# Altium PCB RF-UNIT-QRP.PcbDoc (part 2 of 3)
Units mm, origin at the board's own origin, x right, y up, seen from the top; angles counter-clockwise.
Board outline 187 x 77 mm, 2 copper layers (Top Layer, Top, Bottom Layer, Bottom); 258 components, 175 nets, 770 pads, 3772 vias.
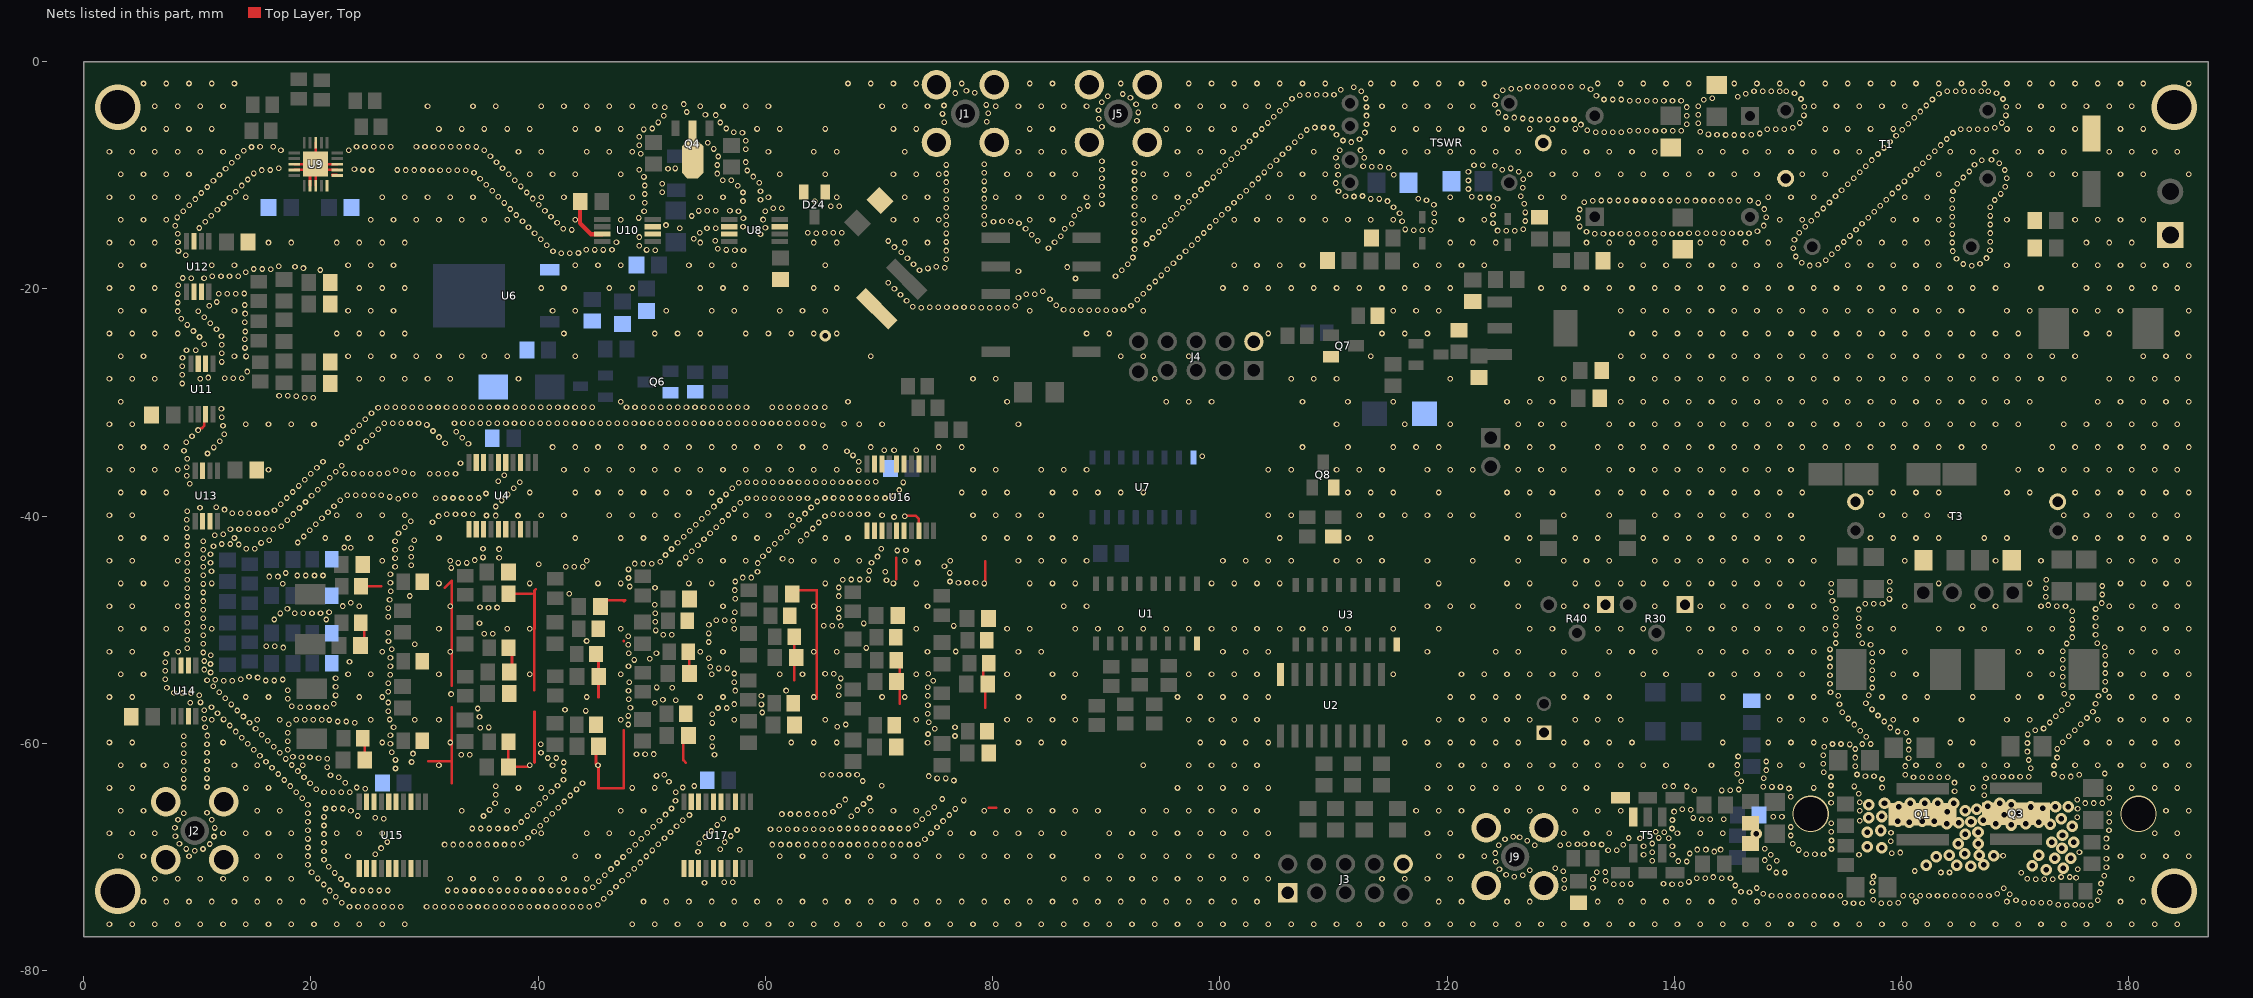
[diagram p2: the nets of this part, all layers, seen from the top]

## Via types
v1: diameter 0.5, hole 0.3, Top Layer, Top to Bottom Layer, Bottom, tented both sides, 3631 vias
v2: diameter 1.016, hole 0.486, Top Layer, Top to Bottom Layer, Bottom, tented both sides, 127 vias
v3: diameter 0.8, hole 0.486, Top Layer, Top to Bottom Layer, Bottom, tented both sides, 6 vias
v4: diameter 4, hole 3, Top Layer, Top to Bottom Layer, Bottom, 4 vias
v5: diameter 1, hole 0.5, Top Layer, Top to Bottom Layer, Bottom, 2 vias
v6: diameter 3.2, hole 3, Top Layer, Top to Bottom Layer, Bottom, 2 vias

## Nets (pads, with @x,y where several pads share a name; then routed paths per layer and width w, separated by ;. In a path a pad name is that pad's centre, name@x,y a point inside that pad or via, vN(x,y) a via of type N, cw(c..) or ccw(c..) an arc to the next point about the centre after c; other vN are vias at no path point) (continued)
GND: (continued)
  other v1: 2.271,-75.923 4.271,-75.923 6.271,-75.923 8.271,-75.923 10.271,-75.923 12.271,-75.923 14.271,-75.923 16.271,-75.923 18.271,-75.923 20.271,-75.923 22.271,-75.923 24.271,-75.923 26.271,-75.923 28.271,-75.923 48.271,-75.923 50.271,-75.923 52.271,-75.923 54.271,-75.923 56.271,-75.923 58.271,-75.923 60.271,-75.923 62.271,-75.923 64.271,-75.923 66.271,-75.923 68.271,-75.923 70.271,-75.923 72.271,-75.923 74.271,-75.923 76.271,-75.923 78.271,-75.923 80.271,-75.923 82.271,-75.923 84.271,-75.923 86.271,-75.923 88.271,-75.923 90.271,-75.923 92.271,-75.923 94.271,-75.923 96.271,-75.923 98.271,-75.923 100.271,-75.923 102.271,-75.923 104.271,-75.923 106.271,-75.923 108.271,-75.923 110.271,-75.923 112.271,-75.923 114.271,-75.923 116.271,-75.923 118.271,-75.923 120.271,-75.923 122.271,-75.923 124.271,-75.923 126.271,-75.923 128.271,-75.923 130.271,-75.923 132.271,-75.923 134.271,-75.923 136.271,-75.923 138.271,-75.923 140.271,-75.923 142.271,-75.923 144.271,-75.923 146.271,-75.923 148.271,-75.923 150.271,-75.923 152.271,-75.923 154.271,-75.923 156.271,-75.923 158.271,-75.923 160.271,-75.923 162.271,-75.923 164.271,-75.923 166.271,-75.923 168.271,-75.923 170.271,-75.923 172.271,-75.923 174.271,-75.923 176.271,-75.923 178.271,-75.923 180.271,-75.923 182.271,-75.923 184.271,-75.923 23.397,-74.368 24.151,-74.368 24.905,-74.368 25.659,-74.368 26.413,-74.368 27.167,-74.368 27.921,-74.368 30.183,-74.368 30.937,-74.368 31.691,-74.368 32.445,-74.368 33.199,-74.368 33.953,-74.368 34.707,-74.368 35.461,-74.368 36.215,-74.368 36.969,-74.368 37.723,-74.368 38.477,-74.368 39.231,-74.368 39.985,-74.368 40.739,-74.368 41.493,-74.368 42.247,-74.368 43.001,-74.368 43.755,-74.368 44.509,-74.368 174.535,-74.235 175.892,-74.235 176.646,-74.235 45.247,-74.215 173.781,-74.215 175.288,-74.19 155.769,-74.058 156.523,-74.058 158.202,-74.058 158.956,-74.058 22.728,-74.021 155.015,-74.03 159.709,-74.027 170.791,-74.02 171.545,-74.02 172.299,-74.02 173.053,-74.02 5.271,-73.923 7.271,-73.923 9.271,-73.923 11.271,-73.923 13.271,-73.923 15.271,-73.923 17.271,-73.923 19.271,-73.923 21.271,-73.923 49.271,-73.923 51.271,-73.923 53.271,-73.923 55.271,-73.923 57.271,-73.923 59.271,-73.923 61.271,-73.923 63.271,-73.923 65.271,-73.923 67.271,-73.923 69.271,-73.923 71.271,-73.923 73.271,-73.923 75.271,-73.923 77.271,-73.923 79.271,-73.923 81.271,-73.923 83.271,-73.923 85.271,-73.923 87.271,-73.923 89.271,-73.923 91.271,-73.923 93.271,-73.923 95.271,-73.923 97.271,-73.923 99.271,-73.923 101.271,-73.923 103.271,-73.923 119.271,-73.923 121.271,-73.923 125.271,-73.923 127.271,-73.923 133.271,-73.923 135.271,-73.923 137.271,-73.923 139.271,-73.923 141.271,-73.923 143.271,-73.923 145.271,-73.923 147.271,-73.923 161.271,-73.923 169.271,-73.923 179.271,-73.923 181.271,-73.923 177.276,-73.821 170.069,-73.803 157.502,-73.776 45.788,-73.688 22.195,-73.488 148.557,-73.409 149.311,-73.409 150.065,-73.409 150.819,-73.409 151.573,-73.409 152.327,-73.409 153.081,-73.409 153.835,-73.409 154.589,-73.409 160.147,-73.413 160.901,-73.412 161.655,-73.412 162.409,-73.412 163.163,-73.411 163.917,-73.411 164.671,-73.41 165.425,-73.41 166.179,-73.41 166.933,-73.409 167.687,-73.409 169.525,-73.281 147.822,-73.239 168.422,-73.242 46.321,-73.155 146.616,-73.113 177.446,-73.086 145.864,-73.06 157.439,-73.025 21.661,-72.955 23.756,-72.952 24.51,-72.952 25.264,-72.952 26.018,-72.952 26.772,-72.952 32.05,-72.952 32.804,-72.952 33.558,-72.952 34.312,-72.952 35.066,-72.952 35.82,-72.952 36.574,-72.952 37.328,-72.952 38.082,-72.952 38.836,-72.952 39.59,-72.952 40.344,-72.952 41.098,-72.952 41.852,-72.952 42.606,-72.952 43.36,-72.952 44.114,-72.952 130.308,-72.76 168.992,-72.748 147.266,-72.73 132.836,-72.711 44.81,-72.663 46.854,-72.622 145.352,-72.507 23.178,-72.468 21.128,-72.422 134.666,-72.386 135.42,-72.386 136.174,-72.37 139.801,-72.386 140.555,-72.386 139.048,-72.347 177.554,-72.34 157.439,-72.271 54.644,-72.261 56.376,-72.236 57.13,-72.226 141.284,-72.194 45.344,-72.13 47.387,-72.089 133.977,-72.081 130.308,-72.006 171.806,-71.973 172.56,-71.973 173.314,-71.973 22.644,-71.935 132.836,-71.957 6.271,-71.923 8.271,-71.923 10.271,-71.923 12.271,-71.923 14.271,-71.923 16.271,-71.923 18.271,-71.923 32.271,-71.923 34.271,-71.923 36.271,-71.923 38.271,-71.923 40.271,-71.923 42.271,-71.923 44.271,-71.923 86.271,-71.923 88.271,-71.923 90.271,-71.923 92.271,-71.923 94.271,-71.923 96.271,-71.923 98.271,-71.923 100.271,-71.923 102.271,-71.923 104.271,-71.923 114.271,-71.923 116.271,-71.923 118.271,-71.923 120.271,-71.923 171.054,-71.915 180.271,-71.923 20.595,-71.889 141.969,-71.88 142.723,-71.876 144.185,-71.876 144.939,-71.876 175.355,-71.816 143.439,-71.769 174.037,-71.758 174.791,-71.758 125.921,-71.747 157.53,-71.724 177.835,-71.641 126.662,-71.605 45.877,-71.596 47.92,-71.556 125.191,-71.558 22.111,-71.402 170.521,-71.382 20.062,-71.355 148.962,-71.361 149.716,-71.361 163.463,-71.364 164.217,-71.363 133.175,-71.343 133.929,-71.329 130.234,-71.256 161.158,-71.235 127.284,-71.18 124.608,-71.081 175.501,-71.077 46.41,-71.063 48.453,-71.023 129.525,-71.001 148.351,-70.919 178.029,-70.912 21.578,-70.869 19.739,-70.674 46.943,-70.53 48.986,-70.489 124.269,-70.407 141.092,-70.399 140.339,-70.358 149.025,-70.336 138.044,-70.323 147.963,-70.272 21.155,-70.245 178.029,-70.158 47.476,-69.997 49.52,-69.956 3.271,-69.923 5.271,-69.923 9.271,-69.923 15.271,-69.923 17.271,-69.923 19.739,-69.92 23.271,-69.923 43.271,-69.923 45.271,-69.923 61.271,-69.923 63.271,-69.923 65.271,-69.923 67.271,-69.923 69.271,-69.923 71.271,-69.923 73.271,-69.923 75.271,-69.923 77.271,-69.923 79.271,-69.923 81.271,-69.923 83.271,-69.923 85.271,-69.923 89.271,-69.923 91.271,-69.923 93.271,-69.923 95.271,-69.923 97.271,-69.923 99.271,-69.923 101.271,-69.923 103.271,-69.923 119.271,-69.923 121.271,-69.923 123.271,-69.923 179.271,-69.923 181.271,-69.923 183.271,-69.923 185.271,-69.923 168.932,-69.885 148.494,-69.801 156.254,-69.816 137.292,-69.8 139.832,-69.8 25.657,-69.757 151.621,-69.748 152.375,-69.748 153.129,-69.748 141.356,-69.693 159.138,-69.676 124.248,-69.653 159.889,-69.609 175.653,-69.584 138.044,-69.569 54.07,-69.536 143.515,-69.521 21.155,-69.491 9.766,-69.458 48.009,-69.464 50.053,-69.423 134.167,-69.396 134.921,-69.396 150.963,-69.379 57.753,-69.36 142.027,-69.348 142.781,-69.348 144.068,-69.348 56.03,-69.328 10.504,-69.3 153.828,-69.3 9.031,-69.29 147.967,-69.262 26.179,-69.213 19.739,-69.166 178.029,-69.131 137.292,-69.046 139.832,-69.046 124.542,-68.959 127.71,-68.953 129.972,-68.953 48.542,-68.931 135.504,-68.918 31.766,-68.907 32.52,-68.907 33.274,-68.907 34.028,-68.907 34.782,-68.907 35.536,-68.907 36.29,-68.907 37.044,-68.907 37.798,-68.907 50.586,-68.89 60.618,-68.907 61.372,-68.907 62.126,-68.907 62.88,-68.907 63.634,-68.907 64.388,-68.907 65.142,-68.907 65.896,-68.907 66.65,-68.907 67.404,-68.907 68.158,-68.907 68.912,-68.907 69.666,-68.907 70.42,-68.907 71.174,-68.907 71.928,-68.907 72.682,-68.907 132.089,-68.888 133.596,-68.903 73.435,-68.886 130.721,-68.865 131.475,-68.865 132.843,-68.865 11.111,-68.853 150.43,-68.845 8.432,-68.833 38.547,-68.822 138.049,-68.815 54.187,-68.791 21.155,-68.737 56.424,-68.685 26.712,-68.68 159.038,-68.607 127.057,-68.577 153.828,-68.546 74.042,-68.438 125.097,-68.45 19.739,-68.412 49.076,-68.397 51.119,-68.357 136.975,-68.362 139.515,-68.362 178.029,-68.377 135.977,-68.331 39.109,-68.319 138.62,-68.323 54.706,-68.245 126.377,-68.25 125.816,-68.22 11.476,-68.193 8.077,-68.168 56.958,-68.152 150.258,-68.111 21.155,-67.983 2.271,-67.923 4.271,-67.923 6.271,-67.923 12.271,-67.923 14.271,-67.923 16.271,-67.923 18.271,-67.923 22.271,-67.923 24.271,-67.923 26.271,-67.923 40.271,-67.923 44.271,-67.923 46.271,-67.923 48.271,-67.923 76.271,-67.923 78.271,-67.923 80.271,-67.923 82.271,-67.923 84.271,-67.923 86.271,-67.923 90.271,-67.923 92.271,-67.923 94.271,-67.923 96.271,-67.923 98.271,-67.923 100.271,-67.923 102.271,-67.923 104.271,-67.923 118.271,-67.923 120.271,-67.923 130.271,-67.923 132.271,-67.923 134.271,-67.923 140.271,-67.923 142.271,-67.923 144.271,-67.923 182.271,-67.923 184.271,-67.923 74.575,-67.905 49.609,-67.864 159.065,-67.853 51.652,-67.824 139.115,-67.821 39.642,-67.786 138.362,-67.782 153.803,-67.792 55.239,-67.712 19.739,-67.658 178.257,-67.658 57.499,-67.628 60.452,-67.564 61.214,-67.564 61.976,-67.564 62.738,-67.564 63.5,-67.564 64.262,-67.564 65.024,-67.564 65.786,-67.564 34.201,-67.491 34.955,-67.491 35.709,-67.491 36.463,-67.491 37.217,-67.491 66.535,-67.491 67.289,-67.491 68.043,-67.491 68.797,-67.491 69.551,-67.491 70.305,-67.491 71.059,-67.491 71.813,-67.491 72.567,-67.491 139.795,-67.494 11.525,-67.441 37.97,-67.454 8.036,-67.415 75.108,-67.372 150.258,-67.357 50.142,-67.331 52.185,-67.291 40.175,-67.253 21.155,-67.229 73.267,-67.21 55.772,-67.178 153.803,-67.038 38.504,-66.921 19.739,-66.904 178.28,-66.905 75.641,-66.838 50.675,-66.798 156.331,-66.803 52.719,-66.757 11.267,-66.732 139.832,-66.741 8.308,-66.711 40.708,-66.719 73.8,-66.677 142.416,-66.669 143.17,-66.669 144.355,-66.669 26.404,-66.628 56.305,-66.645 141.669,-66.564 25.654,-66.549 175.452,-66.514 21.155,-66.475 148.714,-66.462 149.468,-66.462 67.566,-66.404 24.118,-66.385 35.194,-66.391 39.037,-66.388 53.318,-66.3 76.174,-66.305 51.208,-66.265 61.459,-66.221 62.213,-66.221 62.967,-66.221 63.721,-66.221 64.475,-66.221 65.229,-66.221 41.241,-66.186 8.807,-66.146 19.739,-66.15 74.333,-66.144 178.28,-66.151 10.854,-66.101 65.954,-66.014 139.975,-66.001 3.271,-65.923 5.271,-65.923 15.271,-65.923 17.271,-65.923 23.524,-65.921 33.271,-65.923 37.271,-65.923 47.271,-65.923 49.271,-65.923 69.271,-65.923 71.271,-65.923 73.271,-65.923 79.271,-65.923 81.271,-65.923 83.271,-65.923 85.271,-65.923 87.271,-65.923 89.271,-65.923 93.271,-65.923 95.271,-65.923 97.271,-65.923 99.271,-65.923 101.271,-65.923 103.271,-65.923 117.271,-65.923 119.271,-65.923 121.271,-65.923 125.271,-65.923 127.271,-65.923 131.271,-65.923 133.271,-65.923 135.271,-65.923 156.331,-65.928 183.271,-65.923 185.271,-65.923 68.099,-65.871 35.727,-65.858 39.57,-65.855 141.45,-65.843 76.707,-65.772 140.698,-65.786 175.488,-65.761 21.286,-65.732 22.04,-65.732 22.794,-65.732 51.741,-65.732 41.774,-65.653 74.866,-65.611 66.487,-65.48 19.739,-65.396 68.632,-65.338 40.103,-65.322 36.21,-65.279 176.166,-65.255 176.92,-65.255 177.674,-65.255 153.795,-65.219 156.331,-65.174 42.307,-65.12 52.089,-65.063 77.47,-65.024 175.468,-64.969 67.02,-64.947 75.565,-64.897 19.247,-64.825 69.166,-64.805 40.636,-64.788 178.27,-64.794 150.258,-64.703 42.841,-64.587 167.286,-64.572 36.268,-64.527 153.789,-64.465 156.243,-64.425 21.162,-64.316 21.916,-64.316 22.67,-64.316 23.424,-64.316 18.713,-64.292 52.107,-64.309 41.169,-64.255 164.665,-64.204 141.763,-64.137 144.16,-64.141 144.914,-64.138 145.664,-64.064 20.461,-64.037 43.374,-64.054 24.786,-63.996 150.084,-63.969 2.271,-63.923 4.271,-63.923 14.271,-63.923 16.271,-63.923 38.271,-63.923 40.271,-63.923 48.271,-63.923 50.271,-63.923 96.271,-63.923 98.271,-63.923 100.271,-63.923 102.271,-63.923 104.271,-63.923 118.271,-63.923 120.271,-63.923 122.271,-63.923 124.271,-63.923 126.271,-63.923 128.271,-63.923 130.271,-63.923 132.271,-63.923 152.271,-63.923 166.271,-63.923 178.271,-63.923 180.271,-63.923 182.271,-63.923 184.271,-63.923 8.807,-63.884 158.282,-63.891 24.041,-63.883 52.729,-63.883 10.854,-63.839 148.588,-63.834 149.342,-63.834 147.834,-63.831 167.262,-63.818 141.09,-63.797 155.837,-63.79 18.18,-63.759 36.268,-63.773 139.162,-63.774 139.915,-63.758 53.735,-63.753 70.23,-63.737 41.703,-63.722 153.789,-63.711 19.928,-63.504 43.907,-63.52 23.029,-63.462 164.657,-63.45 51.521,-63.373 145.877,-63.341 68.582,-63.312 76.597,-63.269 17.647,-63.226 42.236,-63.189 8.807,-63.13 158.282,-63.137 10.854,-63.085 75.111,-63.086 75.865,-63.086 147.882,-63.079 167.425,-63.082 19.395,-62.971 22.458,-62.97 161.052,-62.969 161.806,-62.969 162.56,-62.979 163.314,-62.979 164.068,-62.979 153.789,-62.957 168.165,-62.939 168.919,-62.939 169.673,-62.939 170.427,-62.929 171.181,-62.929 174.135,-62.925 174.889,-62.923 74.387,-62.876 156.819,-62.882 157.573,-62.882 50.419,-62.865 21.722,-62.805 51.092,-62.754 65.054,-62.759 65.808,-62.759 66.562,-62.757 67.316,-62.759 68.07,-62.759 156.078,-62.74 160.33,-62.752 175.626,-62.763 17.114,-62.692 173.416,-62.7 145.548,-62.662 177.876,-62.649 153.152,-62.554 18.862,-62.437 42.25,-62.435 8.807,-62.376 148.076,-62.35 10.854,-62.331 27.445,-62.213 171.368,-62.199 16.581,-62.159 21.427,-62.112 155.915,-62.004 160.33,-61.998 173.416,-61.946 3.271,-61.923 5.271,-61.923 7.271,-61.923 13.271,-61.923 15.271,-61.923 18.329,-61.904 19.271,-61.923 31.271,-61.923 39.271,-61.923 41.271,-61.923 45.271,-61.923 93.271,-61.923 97.271,-61.923 99.271,-61.923 101.271,-61.923 103.271,-61.923 119.271,-61.923 121.271,-61.923 123.271,-61.923 125.271,-61.923 127.271,-61.923 129.271,-61.923 131.271,-61.923 133.271,-61.923 135.271,-61.923 137.271,-61.923 139.271,-61.923 143.271,-61.923 145.548,-61.908 149.271,-61.923 151.271,-61.923 161.271,-61.923 163.271,-61.923 165.271,-61.923 167.271,-61.923 169.271,-61.923 175.271,-61.923 177.271,-61.923 179.271,-61.923 181.271,-61.923 183.271,-61.923 185.271,-61.923 153.115,-61.801 42.25,-61.681 8.807,-61.622 16.048,-61.626 28.861,-61.642 10.854,-61.577 148.076,-61.596 27.445,-61.459 171.199,-61.464 17.796,-61.371 21.427,-61.358 20.675,-61.299 160.614,-61.3 40.852,-61.289 41.606,-61.289 155.915,-61.25 173.687,-61.242 19.17,-61.233 19.924,-61.233 18.419,-61.166 145.61,-61.157 15.515,-61.093 153.115,-61.047 33.234,-61.001 33.988,-61.001 55.526,-60.998 48.657,-60.965 49.411,-60.965 50.164,-60.94 28.99,-60.899 8.807,-60.868 17.262,-60.838 10.854,-60.823 40.251,-60.833 27.114,-60.781 171.078,-60.72 14.981,-60.56 17.97,-60.56 160.62,-60.546 155.929,-60.496 173.706,-60.489 16.729,-60.305 153.203,-60.298 55.327,-60.271 8.807,-60.114 40.24,-60.079 155.426,-60.093 10.854,-60.069 153.916,-60.054 154.67,-60.054 156.54,-60.054 157.294,-60.054 14.448,-60.027 27.002,-60.036 171.078,-59.966 2.271,-59.923 4.271,-59.923 12.271,-59.923 26.271,-59.923 32.271,-59.923 62.271,-59.923 64.271,-59.923 66.271,-59.923 74.276,-59.932 82.271,-59.923 84.271,-59.923 86.271,-59.923 98.271,-59.923 100.271,-59.923 102.271,-59.923 104.271,-59.923 116.271,-59.923 118.271,-59.923 120.271,-59.923 122.271,-59.923 124.271,-59.923 126.271,-59.923 130.271,-59.923 132.271,-59.923 134.271,-59.923 136.271,-59.923 144.271,-59.923 148.271,-59.923 150.271,-59.923 152.271,-59.923 164.271,-59.923 166.271,-59.923 176.271,-59.923 178.271,-59.923 180.271,-59.923 182.271,-59.923 184.271,-59.923 174.182,-59.904 17.96,-59.806 16.196,-59.772 160.62,-59.792 55.327,-59.517 13.915,-59.493 156.899,-59.412 174.715,-59.371 8.807,-59.36 76.688,-59.349 10.872,-59.315 27.002,-59.282 15.663,-59.238 171.105,-59.212 74.314,-59.179 160.41,-59.068 17.96,-59.052 13.382,-58.96 159.664,-58.957 156.366,-58.879 171.755,-58.832 175.248,-58.837 15.13,-58.705 74.902,-58.706 172.497,-58.693 34.911,-58.634 158.994,-58.611 10.685,-58.585 27.277,-58.58 35.664,-58.599 76.688,-58.595 66.339,-58.531 12.849,-58.427 155.833,-58.346 47.928,-58.341 67.068,-58.337 18.059,-58.304 175.781,-58.304 55.327,-58.202 14.597,-58.172 23.855,-58.18 74.388,-58.155 173.03,-58.16 22.354,-58.077 23.108,-58.077 158.461,-58.078 21.612,-57.946 11.271,-57.923 15.271,-57.923 17.271,-57.923 18.708,-57.921 19.462,-57.92 20.216,-57.92 20.97,-57.92 25.271,-57.923 29.141,-57.935 31.271,-57.923 47.271,-57.923 57.271,-57.923 65.271,-57.923 73.271,-57.923 81.271,-57.923 83.271,-57.923 85.271,-57.923 87.271,-57.923 97.271,-57.923 99.271,-57.923 101.271,-57.923 103.271,-57.923 119.271,-57.923 121.271,-57.923 123.271,-57.923 125.271,-57.923 127.271,-57.923 131.271,-57.923 133.271,-57.923 135.271,-57.923 149.271,-57.923 151.271,-57.923 153.271,-57.923 159.271,-57.923 161.271,-57.923 165.271,-57.923 169.271,-57.923 171.271,-57.923 177.271,-57.923 179.271,-57.923 181.271,-57.923 183.271,-57.923 185.271,-57.923 12.316,-57.894 26.952,-57.899 10.604,-57.835 155.3,-57.812 176.314,-57.771 34.841,-57.669 14.063,-57.639 173.563,-57.627 47.928,-57.587 157.928,-57.545 55.327,-57.448 74.301,-57.406 11.782,-57.361 59.735,-57.28 154.774,-57.272 176.839,-57.23 26.806,-57.159 44.185,-57.147 13.53,-57.106 10.604,-57.081 174.096,-57.094 42.367,-57.051 157.394,-57.012 34.694,-56.93 55.834,-56.89 56.588,-56.889 48.123,-56.858 11.249,-56.828 19.074,-56.833 19.828,-56.833 20.582,-56.833 21.336,-56.833 18.328,-56.725 74.308,-56.652 12.997,-56.573 59.654,-56.573 154.539,-56.556 174.629,-56.561 22.022,-56.519 57.257,-56.54 177.072,-56.513 156.861,-56.478 9.395,-56.43 50.272,-56.416 10.287,-56.397 26.806,-56.405 52.1,-56.204 50.983,-56.165 47.964,-56.122 17.96,-56.067 12.464,-56.04 2.271,-55.923 4.271,-55.923 14.271,-55.923 16.271,-55.923 24.271,-55.923 26.271,-55.923 44.271,-55.923 54.271,-55.923 56.271,-55.923 64.271,-55.923 70.271,-55.923 72.271,-55.923 82.271,-55.923 86.271,-55.923 96.271,-55.923 98.271,-55.923 100.271,-55.923 102.271,-55.923 104.271,-55.923 120.271,-55.923 122.271,-55.923 124.271,-55.923 126.271,-55.923 130.271,-55.923 132.271,-55.923 134.271,-55.923 144.271,-55.923 148.271,-55.923 150.271,-55.923 152.271,-55.923 158.271,-55.923 160.271,-55.923 162.271,-55.923 166.271,-55.923 170.271,-55.923 172.271,-55.923 175.025,-55.919 178.271,-55.923 180.271,-55.923 182.271,-55.923 184.271,-55.923 59.654,-55.819 74.301,-55.819 154.432,-55.809 22.172,-55.78 177.331,-55.805 10.183,-55.761 66.467,-55.772 157.113,-55.768 32.338,-55.661 174.325,-55.639 8.699,-55.572 9.453,-55.572 7.946,-55.544 11.931,-55.506 153.744,-55.501 26.806,-55.45 47.953,-55.368 57.359,-55.354 61.821,-55.355 17.96,-55.313 177.907,-55.318 7.332,-55.106 51.803,-55.114 50.431,-55.078 157.426,-55.082 74.301,-55.065 22.172,-55.026 66.467,-55.018 11.398,-54.973 174.185,-54.898 153.698,-54.749 26.806,-54.696 48.029,-54.617 57.257,-54.607 177.912,-54.564 12.334,-54.48 13.088,-54.48 16.017,-54.465 16.771,-54.465 74.777,-54.481 10.864,-54.44 11.584,-54.395 7.172,-54.369 17.519,-54.377 13.831,-54.355 157.426,-54.328 66.637,-54.283 22.172,-54.272 15.308,-54.206 14.557,-54.149 174.185,-54.144 153.698,-53.995 26.982,-53.963 3.271,-53.923 5.271,-53.923 23.271,-53.923 25.271,-53.923 31.271,-53.923 39.271,-53.923 47.271,-53.923 55.271,-53.923 61.271,-53.923 63.271,-53.923 73.271,-53.923 81.271,-53.923 85.271,-53.923 87.271,-53.923 97.271,-53.923 99.271,-53.923 101.271,-53.923 103.271,-53.923 115.271,-53.923 121.271,-53.923 123.271,-53.923 125.271,-53.923 127.271,-53.923 129.271,-53.923 131.271,-53.923 133.271,-53.923 137.271,-53.923 139.271,-53.923 143.271,-53.923 145.271,-53.923 147.271,-53.923 149.271,-53.923 151.271,-53.923 159.271,-53.923 161.271,-53.923 171.271,-53.923 173.271,-53.923 179.271,-53.923 181.271,-53.923 183.271,-53.923 185.271,-53.923 57.259,-53.853 65.254,-53.869 66.008,-53.869 74.336,-53.869 177.912,-53.81 11.171,-53.765 7.172,-53.615 157.426,-53.574 10.604,-53.504 55.899,-53.404 56.653,-53.404 174.185,-53.39 55.16,-53.254 153.698,-53.241 47.953,-53.222 27.002,-53.209 177.912,-53.056 11.166,-53.011 7.176,-52.861 23.396,-52.815 157.426,-52.82 10.604,-52.75 48.454,-52.658 174.185,-52.636 49.831,-52.559 55.009,-52.515 153.698,-52.487 27.002,-52.455 177.912,-52.302 11.188,-52.257 7.289,-52.115 47.97,-52.08 50.414,-52.081 157.426,-52.066 10.528,-52 8.337,-51.947 2.271,-51.923 4.271,-51.923 26.271,-51.923 32.271,-51.923 54.271,-51.923 56.271,-51.923 64.271,-51.923 66.271,-51.923 74.271,-51.923 82.271,-51.923 84.271,-51.923 100.271,-51.923 102.271,-51.923 104.271,-51.923 118.271,-51.923 124.271,-51.923 126.271,-51.923 130.271,-51.923 134.271,-51.923 136.271,-51.923 138.271,-51.923 142.271,-51.923 144.271,-51.923 146.271,-51.923 148.271,-51.923 150.271,-51.923 152.271,-51.923 158.271,-51.923 160.271,-51.923 170.271,-51.923 172.271,-51.923 180.271,-51.923 182.271,-51.923 184.271,-51.923 76.756,-51.917 174.185,-51.882 153.698,-51.733 27.13,-51.712 9.112,-51.635 68.879,-51.599 17.571,-51.57 177.884,-51.549 16.072,-51.453 16.826,-51.453 47.928,-51.327 157.27,-51.328 29.141,-51.268 10.528,-51.246 174.528,-51.211 154.195,-51.166 156.53,-51.182 177.228,-51.177 55.027,-51.076 26.835,-51.018 44.263,-50.988 9.112,-50.881 175.025,-50.643 47.93,-50.573 10.528,-50.492 156.243,-50.485 51.002,-50.436 51.756,-50.436 177.072,-50.439 154.195,-50.412 35.249,-50.344 36.003,-50.344 55.009,-50.323 26.806,-50.265 9.112,-50.127 50.349,-50.06 3.271,-49.923 5.271,-49.923 7.271,-49.923 11.271,-49.923 31.271,-49.923 37.271,-49.923 39.271,-49.923 47.271,-49.923 57.271,-49.923 73.271,-49.923 81.271,-49.923 83.271,-49.923 87.271,-49.923 89.271,-49.923 91.271,-49.923 93.271,-49.923 95.271,-49.923 97.271,-49.923 99.271,-49.923 101.271,-49.923 103.271,-49.923 105.271,-49.923 107.271,-49.923 109.271,-49.923 111.271,-49.923 115.271,-49.923 119.271,-49.923 127.271,-49.923 129.271,-49.923 133.271,-49.923 135.271,-49.923 137.271,-49.923 141.271,-49.923 143.271,-49.923 145.271,-49.923 147.271,-49.923 149.271,-49.923 151.271,-49.923 153.271,-49.923 157.271,-49.923 159.271,-49.923 163.271,-49.923 165.271,-49.923 167.271,-49.923 171.271,-49.923 173.271,-49.923 179.271,-49.923 181.271,-49.923 183.271,-49.923 185.271,-49.923 175.025,-49.889 10.528,-49.738 156.243,-49.731 177.072,-49.685 76.58,-49.666 65.129,-49.641 65.883,-49.641 66.637,-49.658 154.195,-49.658 55.033,-49.569 34.841,-49.432 68.652,-49.446 9.112,-49.373 50.321,-49.306 57.184,-49.208 55.677,-49.176 56.431,-49.176 175.025,-49.135 16.764,-49.096 21.34,-49.098 10.528,-48.984 156.243,-48.977 66.467,-48.924 177.072,-48.931 154.195,-48.904 26.806,-48.855 9.112,-48.619 17.297,-48.563 50.321,-48.552 18.587,-48.537 19.341,-48.537 20.095,-48.537 20.849,-48.537 21.6,-48.464 57.308,-48.465 175.025,-48.381 10.528,-48.23 156.243,-48.223 66.467,-48.17 177.072,-48.177 17.934,-48.16 154.195,-48.15 26.806,-48.101 35.634,-48.059 36.388,-48.039 34.882,-48.014 2.271,-47.923 4.271,-47.923 8.271,-47.923 22.798,-47.917 24.271,-47.923 32.271,-47.923 56.271,-47.923 64.271,-47.923 74.271,-47.923 86.271,-47.923 88.271,-47.923 118.271,-47.923 120.271,-47.923 122.271,-47.923 126.271,-47.923 130.271,-47.923 132.271,-47.923 138.271,-47.923 142.271,-47.923 144.271,-47.923 146.271,-47.923 148.271,-47.923 150.271,-47.923 152.271,-47.923 160.271,-47.923 166.271,-47.923 168.271,-47.923 172.271,-47.923 173.669,-47.926 174.423,-47.926 178.271,-47.923 180.271,-47.923 182.271,-47.923 184.271,-47.923 9.112,-47.865 172.922,-47.828 50.256,-47.801 156.806,-47.722 157.56,-47.722 158.314,-47.722 177.614,-47.653 23.518,-47.626 10.528,-47.476 153.915,-47.449 26.927,-47.357 158.931,-47.287 57.336,-47.26 9.112,-47.111 172.694,-47.109 28.708,-47.034 66.467,-47.037 177.671,-46.901 42.743,-46.829 10.528,-46.722 153.805,-46.704 27.023,-46.609 158.947,-46.534 57.308,-46.507 9.112,-46.357 172.694,-46.355 50.287,-46.294 66.467,-46.283 48.063,-46.191 177.671,-46.147 10.528,-45.968 17.53,-45.942 153.805,-45.95 3.271,-45.923 5.271,-45.923 7.271,-45.923 11.271,-45.923 31.271,-45.923 39.271,-45.923 45.271,-45.923 47.271,-45.923 53.271,-45.923 55.271,-45.923 65.271,-45.923 71.271,-45.923 73.271,-45.923 79.271,-45.923 83.271,-45.923 85.271,-45.923 87.271,-45.923 99.271,-45.923 101.271,-45.923 103.271,-45.923 105.271,-45.923 119.271,-45.923 125.271,-45.923 127.271,-45.923 131.271,-45.923 133.271,-45.923 135.271,-45.923 137.271,-45.923 139.271,-45.923 141.271,-45.923 143.271,-45.923 145.271,-45.923 147.271,-45.923 149.271,-45.923 151.271,-45.923 163.271,-45.923 171.271,-45.923 179.271,-45.923 181.271,-45.923 183.271,-45.923 185.271,-45.923 78.5,-45.874 27.002,-45.856 76.993,-45.873 77.746,-45.853 158.947,-45.78 57.341,-45.753 76.248,-45.754 70.66,-45.653 9.112,-45.603 66.804,-45.609 172.742,-45.603 67.557,-45.574 68.311,-45.574 69.065,-45.573 47.953,-45.445 58.011,-45.407 58.765,-45.407 16.345,-45.321 17.099,-45.321 18.806,-45.224 19.56,-45.224 20.314,-45.224 21.068,-45.224 10.528,-45.214 27.002,-45.102 17.782,-45.003 76.219,-45.001 59.308,-44.884 70.558,-44.906 9.112,-44.849 11.254,-44.854 69.142,-44.823 47.953,-44.691 32.353,-44.559 10.528,-44.46 27.408,-44.466 43.175,-44.456 43.929,-44.456 42.421,-44.444 75.758,-44.404 28.824,-44.337 40.06,-44.237 48.503,-44.175 49.257,-44.175 50.011,-44.194 52.466,-44.167 59.324,-44.13 11.166,-44.105 32.965,-44.119 33.719,-44.119 9.112,-44.095 69.337,-44.094 73.437,-44.085 50.744,-44.018 2.271,-43.923 4.271,-43.923 8.271,-43.923 26.271,-43.923 32.271,-43.923 44.271,-43.923 54.271,-43.923 56.271,-43.923 58.271,-43.923 62.271,-43.923 64.271,-43.923 66.271,-43.923 68.271,-43.923 72.271,-43.923 76.271,-43.923 82.271,-43.923 84.271,-43.923 86.271,-43.923 88.271,-43.923 100.271,-43.923 102.271,-43.923 104.271,-43.923 106.271,-43.923 110.271,-43.923 112.271,-43.923 114.271,-43.923 118.271,-43.923 122.271,-43.923 126.271,-43.923 130.271,-43.923 132.271,-43.923 134.271,-43.923 138.271,-43.923 140.271,-43.923 142.271,-43.923 144.271,-43.923 146.271,-43.923 148.271,-43.923 150.271,-43.923 152.271,-43.923 160.271,-43.923 168.271,-43.923 172.271,-43.923 178.271,-43.923 180.271,-43.923 182.271,-43.923 184.271,-43.923 34.43,-43.867 61.512,-43.756 10.528,-43.706 27.408,-43.712 36.563,-43.652 35.147,-43.635 52.999,-43.634 28.824,-43.583 69.867,-43.558 59.786,-43.534 51.207,-43.423 9.112,-43.341 11.166,-43.351 53.532,-43.1 71.615,-43.025 72.375,-43.015 27.408,-42.958 60.291,-42.975 10.528,-42.952 14.313,-42.879 35.147,-42.881 36.563,-42.898 51.74,-42.89 70.199,-42.881 15.067,-42.875 28.824,-42.829 23.52,-42.787 22.928,-42.761 11.427,-42.644 9.112,-42.587 54.065,-42.567 13.663,-42.497 12.156,-42.452 12.91,-42.452 60.824,-42.441 15.617,-42.359 52.273,-42.357 18.839,-42.323 10.528,-42.198 27.408,-42.204 63.112,-42.157 16.337,-42.135 29.104,-42.129 54.598,-42.034 3.271,-41.923 5.271,-41.923 7.271,-41.923 13.271,-41.923 21.271,-41.923 23.271,-41.923 25.271,-41.923 31.271,-41.923 43.271,-41.923 47.271,-41.923 49.271,-41.923 51.271,-41.923 57.271,-41.923 59.271,-41.923 65.271,-41.923 67.271,-41.923 79.271,-41.923 81.271,-41.923 83.271,-41.923 85.271,-41.923 87.271,-41.923 105.271,-41.923 111.271,-41.923 113.271,-41.923 125.271,-41.923 127.271,-41.923 131.271,-41.923 133.271,-41.923 137.271,-41.923 139.271,-41.923 141.271,-41.923 143.271,-41.923 145.271,-41.923 147.271,-41.923 149.271,-41.923 151.271,-41.923 157.271,-41.923 159.271,-41.923 161.271,-41.923 163.271,-41.923 167.271,-41.923 169.271,-41.923 175.271,-41.923 177.271,-41.923 179.271,-41.923 181.271,-41.923 183.271,-41.923 185.271,-41.923 61.357,-41.908 9.112,-41.833 52.806,-41.823 19.372,-41.79 11.55,-41.691 63.645,-41.624 12.296,-41.582 27.714,-41.515 55.131,-41.501 61.891,-41.375 53.339,-41.29 19.905,-41.257 12.92,-41.16 13.674,-41.16 14.428,-41.16 15.182,-41.16 15.936,-41.16 16.69,-41.16 9.081,-41.08 64.178,-41.09 28.248,-40.982 55.665,-40.968 17.393,-40.886 62.424,-40.842 53.872,-40.757 20.438,-40.723 64.711,-40.557 30.703,-40.529 28.781,-40.449 56.198,-40.435 17.926,-40.353 9.081,-40.326 62.957,-40.309 54.406,-40.224 20.971,-40.19 71.329,-40.08 65.244,-40.024 31.237,-39.996 35.459,-39.948 36.277,-39.953 38.227,-39.953 2.271,-39.923 4.271,-39.923 22.271,-39.923 24.271,-39.923 26.271,-39.923 28.271,-39.923 40.271,-39.923 42.271,-39.923 46.271,-39.923 48.271,-39.923 50.271,-39.923 52.271,-39.923 58.271,-39.923 60.271,-39.923 62.271,-39.923 70.271,-39.923 78.271,-39.923 80.271,-39.923 82.271,-39.923 84.271,-39.923 104.271,-39.923 106.271,-39.923 112.271,-39.923 114.271,-39.923 116.271,-39.923 118.271,-39.923 120.271,-39.923 122.271,-39.923 126.271,-39.923 130.271,-39.923 134.271,-39.923 138.271,-39.923 140.271,-39.923 142.271,-39.923 144.271,-39.923 146.271,-39.923 148.271,-39.923 150.271,-39.923 158.271,-39.923 160.271,-39.923 162.271,-39.923 164.271,-39.923 174.271,-39.923 176.271,-39.923 178.271,-39.923 180.271,-39.923 182.271,-39.923 184.271,-39.923 56.731,-39.902 18.459,-39.819 31.971,-39.824 32.725,-39.824 33.479,-39.824 34.233,-39.824 65.971,-39.824 66.725,-39.824 67.479,-39.824 68.233,-39.824 68.987,-39.824 63.49,-39.776 13.08,-39.744 13.834,-39.744 14.588,-39.744 15.342,-39.744 16.096,-39.744 54.939,-39.691 21.504,-39.657 9.112,-39.573 16.801,-39.475 12.398,-39.423 57.264,-39.368 18.992,-39.286 10.242,-39.252 64.023,-39.242 11.674,-39.213 36.268,-39.156 55.472,-39.158 22.038,-39.124 17.334,-38.942 57.797,-38.835 19.525,-38.753 64.556,-38.709 36.801,-38.623 56.005,-38.624 22.571,-38.591 27.684,-38.464 17.867,-38.409 31.001,-38.421 31.754,-38.408 32.508,-38.408 33.262,-38.408 34.016,-38.408 34.77,-38.408 58.431,-38.427 59.185,-38.427 59.939,-38.427 60.693,-38.427 61.447,-38.427 62.201,-38.427 62.955,-38.427 63.709,-38.427 65.247,-38.408 66.001,-38.408 66.755,-38.408 67.509,-38.408 68.263,-38.408 69.017,-38.408 69.771,-38.408 70.525,-38.408 26.946,-38.312 71.258,-38.23 20.059,-38.22 23.191,-38.162 23.945,-38.162 24.699,-38.162 25.453,-38.162 26.207,-38.162 28.377,-38.168 29.131,-38.162 37.334,-38.09 56.538,-38.091 35.411,-38.01 3.271,-37.923 5.271,-37.923 7.271,-37.923 39.271,-37.923 43.271,-37.923 45.271,-37.923 47.271,-37.923 49.271,-37.923 51.271,-37.923 53.271,-37.923 55.271,-37.923 77.271,-37.923 79.271,-37.923 81.271,-37.923 85.271,-37.923 87.271,-37.923 89.271,-37.923 91.271,-37.923 93.271,-37.923 111.271,-37.923 113.271,-37.923 115.271,-37.923 119.271,-37.923 125.271,-37.923 127.271,-37.923 129.271,-37.923 133.271,-37.923 135.271,-37.923 137.271,-37.923 139.271,-37.923 141.271,-37.923 143.271,-37.923 145.271,-37.923 147.271,-37.923 149.271,-37.923 151.271,-37.923 157.271,-37.923 159.271,-37.923 161.271,-37.923 163.271,-37.923 169.271,-37.923 171.271,-37.923 175.271,-37.923 177.271,-37.923 179.271,-37.923 181.271,-37.923 183.271,-37.923 185.271,-37.923 18.4,-37.875 71.791,-37.697 20.592,-37.687 37.867,-37.556 57.071,-37.558 18.933,-37.342 9.333,-37.158 21.125,-37.154 57.648,-37.073 38.388,-37.012 58.4,-37.011 59.154,-37.011 59.908,-37.011 60.662,-37.011 61.416,-37.011 62.17,-37.011 62.924,-37.011 63.678,-37.011 64.432,-37.011 65.186,-37.011 65.94,-37.011 66.694,-37.011 67.448,-37.011 68.202,-37.011 68.956,-37.011 72.149,-37.033 69.709,-36.985 36.477,-36.944 19.466,-36.809 21.658,-36.62 9.081,-36.447 37.01,-36.41 20,-36.276 23.007,-36.26 23.761,-36.26 24.515,-36.26 25.269,-36.26 26.023,-36.26 28.954,-36.26 30.462,-36.26 31.216,-36.26 31.97,-36.26 32.724,-36.26 26.776,-36.224 28.211,-36.135 22.191,-36.087 68.218,-35.969 27.479,-35.952 2.271,-35.923 4.271,-35.923 6.271,-35.923 8.271,-35.923 16.271,-35.923 42.271,-35.923 44.271,-35.923 46.271,-35.923 48.271,-35.923 50.271,-35.923 52.271,-35.923 54.271,-35.923 56.271,-35.923 58.271,-35.923 60.271,-35.923 62.271,-35.923 64.271,-35.923 66.271,-35.923 78.271,-35.923 80.271,-35.923 84.271,-35.923 86.271,-35.923 88.271,-35.923 104.271,-35.923 106.271,-35.923 110.271,-35.923 112.271,-35.923 114.271,-35.923 118.271,-35.923 120.271,-35.923 122.271,-35.923 126.271,-35.923 128.271,-35.923 130.271,-35.923 134.271,-35.923 136.271,-35.923 138.271,-35.923 140.271,-35.923 142.271,-35.923 144.271,-35.923 146.271,-35.923 148.271,-35.923 150.271,-35.923 170.271,-35.923 172.271,-35.923 174.271,-35.923 176.271,-35.923 178.271,-35.923 180.271,-35.923 182.271,-35.923 184.271,-35.923 20.533,-35.743 9.081,-35.693 22.724,-35.554 33.166,-35.338 21.066,-35.21 68.218,-35.215 9.112,-34.94 98.442,-34.729 67.71,-34.658 10.904,-34.485 67.183,-34.29 8.836,-34.238 70.47,-34.214 71.329,-34.204 73.279,-34.204 11.438,-33.952 24.324,-33.955 3.271,-33.923 5.271,-33.923 7.271,-33.923 41.271,-33.923 43.271,-33.923 45.271,-33.923 47.271,-33.923 49.271,-33.923 51.271,-33.923 53.271,-33.923 55.271,-33.923 57.271,-33.923 59.271,-33.923 61.271,-33.923 63.271,-33.923 65.271,-33.923 69.271,-33.923 75.271,-33.923 77.271,-33.923 107.271,-33.923 111.271,-33.923 115.271,-33.923 117.271,-33.923 119.271,-33.923 125.271,-33.923 127.271,-33.923 129.271,-33.923 133.271,-33.923 135.271,-33.923 137.271,-33.923 139.271,-33.923 141.271,-33.923 143.271,-33.923 145.271,-33.923 147.271,-33.923 149.271,-33.923 151.271,-33.923 153.271,-33.923 155.271,-33.923 157.271,-33.923 159.271,-33.923 161.271,-33.923 163.271,-33.923 165.271,-33.923 167.271,-33.923 173.271,-33.923 175.271,-33.923 177.271,-33.923 179.271,-33.923 181.271,-33.923 183.271,-33.923 185.271,-33.923 22.665,-33.61 33.866,-33.627 31.811,-33.575 9.019,-33.507 11.971,-33.419 24.857,-33.421 23.199,-33.077 33.333,-33.094 31.278,-33.042 9.536,-32.958 25.39,-32.888 12.377,-32.784 23.732,-32.544 32.8,-32.56 30.745,-32.509 25.923,-32.355 12.264,-32.038 24.265,-32.011 65.044,-31.992 30.212,-31.975 2.271,-31.923 4.271,-31.923 14.271,-31.923 16.271,-31.923 18.271,-31.923 20.271,-31.923 68.271,-31.923 70.271,-31.923 82.271,-31.923 110.271,-31.923 116.271,-31.923 120.271,-31.923 126.271,-31.923 128.271,-31.923 130.271,-31.923 134.271,-31.923 136.271,-31.923 138.271,-31.923 140.271,-31.923 142.271,-31.923 144.271,-31.923 146.271,-31.923 148.271,-31.923 150.271,-31.923 152.271,-31.923 154.271,-31.923 156.271,-31.923 158.271,-31.923 160.271,-31.923 162.271,-31.923 164.271,-31.923 166.271,-31.923 168.271,-31.923 170.271,-31.923 174.271,-31.923 176.271,-31.923 178.271,-31.923 180.271,-31.923 182.271,-31.923 184.271,-31.923 66.929,-31.874 26.458,-31.823 27.212,-31.823 27.966,-31.823 28.72,-31.823 29.474,-31.823 32.642,-31.823 33.396,-31.823 34.15,-31.823 34.904,-31.823 35.658,-31.823 36.412,-31.823 37.166,-31.823 37.92,-31.823 38.674,-31.823 39.428,-31.823 40.182,-31.823 40.936,-31.823 41.69,-31.823 42.444,-31.823 43.198,-31.823 43.952,-31.823 44.706,-31.823 45.46,-31.823 46.214,-31.823 46.968,-31.823 47.722,-31.823 48.476,-31.823 49.23,-31.823 49.984,-31.823 50.738,-31.823 51.492,-31.823 52.246,-31.823 53,-31.823 53.754,-31.823 54.508,-31.823 55.262,-31.823 56.016,-31.823 56.77,-31.823 57.524,-31.823 58.278,-31.823 59.032,-31.823 59.786,-31.823 60.54,-31.823 61.294,-31.823 62.048,-31.823 62.802,-31.823 63.556,-31.823 64.31,-31.823 24.798,-31.478 12.158,-31.292 25.331,-30.944 12.128,-30.538 25.912,-30.463 26.663,-30.407 27.417,-30.407 28.171,-30.407 28.925,-30.407 29.679,-30.407 30.433,-30.407 31.187,-30.407 31.941,-30.407 32.695,-30.407 33.449,-30.407 34.203,-30.407 34.957,-30.407 35.711,-30.407 36.465,-30.407 37.219,-30.407 37.973,-30.407 38.727,-30.407 39.481,-30.407 40.235,-30.407 40.989,-30.407 41.743,-30.407 42.497,-30.407 43.251,-30.407 44.005,-30.407 44.759,-30.407 47.775,-30.407 48.529,-30.407 49.283,-30.407 50.037,-30.407 50.791,-30.407 51.545,-30.407 52.299,-30.407 53.053,-30.407 53.807,-30.407 54.561,-30.407 55.315,-30.407 56.069,-30.407 56.823,-30.407 57.577,-30.407 58.331,-30.407 60.593,-30.407 61.347,-30.407 62.101,-30.407 62.855,-30.407 63.609,-30.407 64.363,-30.407 65.218,-30.417 3.271,-29.923 47.271,-29.923 67.271,-29.923 81.271,-29.923 95.271,-29.923 97.271,-29.923 99.271,-29.923 107.271,-29.923 111.271,-29.923 115.271,-29.923 125.271,-29.923 127.271,-29.923 129.271,-29.923 135.271,-29.923 137.271,-29.923 139.271,-29.923 141.271,-29.923 143.271,-29.923 145.271,-29.923 147.271,-29.923 149.271,-29.923 151.271,-29.923 153.271,-29.923 155.271,-29.923 157.271,-29.923 159.271,-29.923 161.271,-29.923 163.271,-29.923 165.271,-29.923 167.271,-29.923 169.271,-29.923 171.271,-29.923 177.271,-29.923 179.271,-29.923 181.271,-29.923 183.271,-29.923 185.271,-29.923 19.45,-29.585 20.204,-29.585 18.706,-29.462 17.2,-29.419 17.954,-29.419 8.68,-28.325 2.271,-27.923 4.271,-27.923 6.271,-27.923 10.271,-27.923 24.271,-27.923 26.271,-27.923 28.271,-27.923 30.271,-27.923 32.271,-27.923 38.271,-27.923 78.271,-27.923 80.271,-27.923 94.271,-27.923 106.271,-27.923 108.271,-27.923 110.271,-27.923 120.271,-27.923 128.271,-27.923 130.271,-27.923 136.271,-27.923 138.271,-27.923 140.271,-27.923 142.271,-27.923 144.271,-27.923 146.271,-27.923 148.271,-27.923 150.271,-27.923 152.271,-27.923 154.271,-27.923 156.271,-27.923 158.271,-27.923 160.271,-27.923 162.271,-27.923 164.271,-27.923 166.271,-27.923 168.271,-27.923 170.271,-27.923 172.271,-27.923 174.271,-27.923 178.271,-27.923 180.271,-27.923 182.271,-27.923 184.271,-27.923 12.418,-27.871 13.172,-27.871 13.926,-27.871 10.973,-27.805 8.67,-27.571 14.388,-27.276 8.67,-26.817 12.158,-26.428 8.7,-26.063 14.294,-25.944 3.271,-25.923 5.271,-25.923 13.271,-25.923 23.271,-25.923 25.271,-25.923 27.271,-25.923 29.271,-25.923 31.271,-25.923 33.271,-25.923 35.271,-25.923 37.271,-25.923 43.271,-25.923 69.271,-25.923 91.271,-25.923 93.271,-25.923 97.271,-25.923 113.271,-25.923 135.271,-25.923 137.271,-25.923 139.271,-25.923 141.271,-25.923 143.271,-25.923 145.271,-25.923 147.271,-25.923 149.271,-25.923 151.271,-25.923 153.271,-25.923 155.271,-25.923 157.271,-25.923 159.271,-25.923 161.271,-25.923 163.271,-25.923 165.271,-25.923 167.271,-25.923 169.271,-25.923 171.271,-25.923 173.271,-25.923 175.271,-25.923 181.271,-25.923 183.271,-25.923 185.271,-25.923 12.158,-25.674 9.861,-25.404 9.053,-25.397 14.199,-25.196 12.158,-24.92 10.62,-24.862 14.192,-24.442 10.197,-24.238 12.133,-24.167 2.271,-23.923 4.271,-23.923 6.271,-23.923 8.271,-23.923 22.271,-23.923 24.271,-23.923 26.271,-23.923 28.271,-23.923 42.271,-23.923 50.271,-23.923 52.271,-23.923 54.271,-23.923 58.271,-23.923 60.271,-23.923 62.271,-23.923 64.271,-23.923 66.271,-23.923 88.271,-23.923 90.271,-23.923 104.271,-23.923 114.271,-23.923 116.271,-23.923 118.271,-23.923 136.271,-23.923 138.271,-23.923 140.271,-23.923 142.271,-23.923 144.271,-23.923 146.271,-23.923 148.271,-23.923 150.271,-23.923 152.271,-23.923 154.271,-23.923 156.271,-23.923 158.271,-23.923 160.271,-23.923 162.271,-23.923 164.271,-23.923 166.271,-23.923 168.271,-23.923 170.271,-23.923 176.271,-23.923 178.271,-23.923 184.271,-23.923 14.224,-23.749 9.664,-23.705 11.69,-23.557 9.131,-23.172 11.157,-23.023 14.192,-22.927 8.598,-22.639 10.623,-22.49 14.209,-22.173 8.289,-21.951 10.09,-21.957 3.271,-21.923 5.271,-21.923 13.271,-21.923 23.271,-21.923 25.271,-21.923 27.271,-21.923 41.271,-21.923 43.271,-21.923 51.271,-21.923 55.271,-21.923 57.271,-21.923 61.271,-21.923 63.271,-21.923 65.271,-21.923 83.271,-21.923 93.271,-21.923 115.271,-21.923 117.271,-21.923 119.271,-21.923 135.271,-21.923 137.271,-21.923 139.271,-21.923 141.271,-21.923 143.271,-21.923 145.271,-21.923 147.271,-21.923 149.271,-21.923 151.271,-21.923 153.271,-21.923 155.271,-21.923 157.271,-21.923 159.271,-21.923 161.271,-21.923 163.271,-21.923 165.271,-21.923 169.271,-21.923 171.271,-21.923 175.271,-21.923 177.271,-21.923 179.271,-21.923 185.271,-21.923 86.995,-21.881 87.749,-21.881 88.503,-21.884 89.257,-21.884 90.011,-21.884 90.765,-21.884 86.244,-21.824 91.518,-21.839 73.718,-21.665 78.993,-21.648 79.747,-21.65 80.501,-21.65 81.255,-21.65 74.47,-21.608 75.224,-21.608 75.978,-21.608 76.732,-21.608 77.486,-21.608 78.24,-21.608 72.969,-21.578 11.044,-21.498 81.988,-21.476 92.18,-21.478 85.587,-21.452 14.192,-21.419 8.289,-21.197 11.714,-21.151 72.426,-21.055 92.717,-20.948 85.054,-20.919 82.271,-20.777 71.893,-20.522 82.959,-20.468 83.713,-20.466 8.289,-20.443 11.887,-20.418 12.641,-20.418 13.395,-20.418 14.149,-20.408 93.25,-20.415 84.421,-20.205 71.36,-19.989 2.271,-19.923 4.271,-19.923 6.271,-19.923 24.271,-19.923 26.271,-19.923 28.271,-19.923 40.271,-19.923 42.271,-19.923 46.271,-19.923 48.271,-19.923 54.271,-19.923 56.271,-19.923 58.271,-19.923 64.271,-19.923 66.271,-19.923 100.271,-19.923 102.271,-19.923 104.271,-19.923 106.271,-19.923 108.271,-19.923 110.271,-19.923 112.271,-19.923 114.271,-19.923 116.271,-19.923 118.271,-19.923 120.271,-19.923 128.271,-19.923 130.271,-19.923 132.271,-19.923 134.271,-19.923 136.271,-19.923 138.271,-19.923 140.271,-19.923 142.271,-19.923 144.271,-19.923 146.271,-19.923 148.271,-19.923 150.271,-19.923 152.271,-19.923 154.271,-19.923 156.271,-19.923 158.271,-19.923 160.271,-19.923 162.271,-19.923 164.271,-19.923 166.271,-19.923 168.271,-19.923 172.271,-19.923 176.271,-19.923 178.271,-19.923 180.271,-19.923 182.271,-19.923 184.271,-19.923 93.783,-19.882 8.319,-19.689 70.826,-19.455 94.316,-19.349 87.295,-19.089 9.48,-19.059 10.598,-19.057 8.71,-19.045 11.331,-18.88 12.085,-18.88 12.839,-18.88 13.593,-18.88 90.819,-18.894 94.849,-18.816 14.26,-18.527 82.271,-18.438 73.569,-18.361 91.352,-18.361 20.832,-18.338 95.382,-18.282 14.962,-18.254 15.716,-18.254 16.47,-18.26 74.306,-18.2 19.344,-18.167 75.79,-18.14 86.562,-18.081 18.6,-18.045 75.043,-18.042 17.18,-18.006 166.169,-17.962 151.93,-17.948 3.271,-17.923 5.271,-17.923 11.271,-17.923 13.271,-17.923 23.271,-17.923 25.271,-17.923 27.271,-17.923 43.271,-17.923 45.271,-17.923 47.271,-17.923 53.271,-17.923 55.271,-17.923 57.271,-17.923 65.271,-17.923 101.271,-17.923 103.271,-17.923 105.271,-17.923 107.271,-17.923 117.271,-17.923 119.271,-17.923 121.271,-17.923 123.271,-17.923 135.271,-17.923 137.271,-17.923 139.271,-17.923 141.271,-17.923 143.271,-17.923 145.271,-17.923 147.271,-17.923 149.271,-17.923 155.271,-17.923 157.271,-17.923 159.271,-17.923 161.271,-17.923 163.271,-17.923 169.271,-17.923 175.271,-17.923 177.271,-17.923 179.271,-17.923 181.271,-17.923 183.271,-17.923 185.271,-17.923 152.68,-17.871 73.036,-17.828 91.885,-17.827 165.431,-17.808 166.9,-17.777 95.916,-17.749 151.22,-17.695 153.321,-17.474 75.918,-17.383 164.835,-17.346 72.503,-17.295 167.473,-17.286 92.352,-17.235 96.449,-17.216 150.697,-17.152 8.992,-17.048 153.855,-16.94 42.039,-16.858 42.793,-16.858 43.547,-16.845 71.969,-16.762 41.307,-16.678 96.982,-16.683 164.501,-16.67 8.344,-16.661 75.918,-16.629 50.297,-16.603 57.322,-16.603 58.076,-16.603 167.776,-16.596 44.991,-16.573 45.745,-16.573 49.544,-16.573 56.569,-16.573 44.238,-16.542 46.499,-16.549 92.496,-16.495 55.821,-16.476 84.922,-16.429 150.464,-16.435 154.388,-16.407 71.36,-16.318 48.892,-16.194 40.753,-16.166 97.515,-16.15 93.544,-16.057 2.271,-15.923 4.271,-15.923 6.271,-15.923 8.299,-15.908 16.271,-15.923 18.271,-15.923 22.271,-15.923 24.271,-15.923 26.271,-15.923 28.271,-15.923 46.893,-15.906 54.271,-15.923 64.271,-15.923 66.271,-15.923 72.271,-15.923 74.271,-15.923 120.271,-15.923 122.271,-15.923 124.271,-15.923 132.271,-15.923 134.271,-15.923 136.271,-15.923 138.271,-15.923 142.271,-15.923 144.271,-15.923 146.271,-15.923 148.271,-15.923 156.271,-15.923 158.271,-15.923 160.271,-15.923 162.271,-15.923 164.452,-15.918 176.271,-15.923 178.271,-15.923 180.271,-15.923 85.455,-15.896 75.918,-15.875 154.921,-15.874 167.81,-15.843 70.827,-15.785 55.591,-15.758 83.968,-15.769 92.496,-15.741 150.571,-15.688 40.22,-15.633 98.048,-15.617 53.696,-15.59 94.077,-15.524 48.899,-15.44 85.988,-15.363 155.454,-15.341 83.434,-15.235 59.57,-15.182 8.289,-15.155 133.005,-15.147 133.759,-15.147 134.513,-15.147 135.267,-15.147 136.021,-15.147 136.775,-15.147 137.529,-15.147 138.283,-15.147 139.037,-15.147 139.791,-15.147 140.545,-15.147 164.452,-15.164 75.918,-15.121 39.687,-15.1 64.473,-15.091 141.297,-15.099 142.051,-15.1 142.805,-15.1 143.559,-15.1 144.313,-15.101 145.067,-15.101 145.821,-15.102 146.575,-15.102 63.72,-15.067 98.581,-15.084 167.81,-15.089 54.229,-15.057 65.226,-15.048 65.98,-15.048 66.734,-15.053 150.986,-15.059 94.611,-14.991 92.496,-14.987 132.271,-14.973 147.311,-14.94 125.195,-14.891 125.949,-14.891 124.441,-14.869 117.054,-14.839 117.808,-14.839 42.947,-14.81 118.56,-14.792 155.987,-14.808 116.303,-14.766 126.691,-14.757 42.199,-14.717 82.901,-14.702 86.346,-14.699 10.178,-14.638 52.461,-14.651 54.866,-14.653 55.62,-14.653 60.005,-14.624 39.154,-14.567 58.032,-14.534 99.115,-14.55 151.519,-14.526 131.682,-14.502 95.144,-14.457 8.05,-14.439 147.866,-14.429 164.452,-14.41 51.251,-14.385 75.918,-14.367 167.81,-14.335 79.276,-14.312 86.973,-14.28 156.52,-14.275 92.496,-14.233 124.039,-14.232 82.321,-14.221 41.666,-14.183 10.711,-14.105 118.866,-14.103 80.077,-14.078 80.831,-14.057 81.585,-14.057 116.038,-14.06 38.621,-14.033 126.866,-14.024 99.648,-14.017 152.052,-13.993 3.271,-13.923 5.271,-13.923 7.271,-13.923 25.271,-13.923 27.271,-13.923 29.271,-13.923 31.271,-13.923 33.271,-13.923 35.271,-13.923 37.271,-13.923 43.271,-13.923 47.271,-13.923 71.271,-13.923 73.271,-13.923 75.271,-13.923 83.271,-13.923 85.271,-13.923 93.271,-13.923 95.677,-13.924 101.271,-13.923 103.271,-13.923 105.271,-13.923 107.271,-13.923 109.271,-13.923 111.271,-13.923 113.271,-13.923 115.271,-13.923 121.271,-13.923 123.271,-13.923 149.271,-13.923 151.271,-13.923 159.271,-13.923 161.271,-13.923 163.271,-13.923 169.271,-13.923 175.271,-13.923 177.271,-13.923 179.271,-13.923 181.271,-13.923 59.799,-13.898 58.069,-13.776 48.865,-13.755 131.556,-13.758 157.054,-13.741 8.24,-13.71 148.085,-13.707 41.133,-13.65 164.452,-13.656 75.918,-13.613 11.244,-13.572 53.527,-13.585 167.81,-13.581 79.276,-13.558 87.175,-13.554 38.088,-13.5 92.496,-13.479 100.181,-13.484 124.039,-13.478 152.585,-13.46 96.21,-13.391 115.817,-13.339 118.866,-13.349 126.866,-13.27 157.587,-13.208 8.758,-13.162 57.633,-13.161 59.986,-13.168 49.324,-13.156 54.136,-13.141 40.6,-13.117 54.89,-13.115 55.644,-13.115 56.88,-13.125 11.777,-13.039 131.674,-13.014 87.675,-12.989 37.554,-12.967 147.906,-12.975 100.714,-12.951 153.119,-12.926 60.692,-12.903 61.446,-12.903 164.452,-12.902 75.918,-12.859 96.743,-12.858 79.276,-12.804 115.284,-12.806 167.81,-12.827 65.761,-12.72 66.515,-12.72 92.496,-12.725 124.049,-12.724 88.371,-12.701 158.12,-12.675 9.291,-12.629 40.067,-12.584 118.84,-12.595 89.622,-12.524 12.31,-12.506 126.787,-12.52 37.021,-12.434 147.38,-12.435 49.396,-12.406 101.247,-12.418 153.652,-12.393 132.065,-12.369 97.276,-12.325 58.032,-12.272 64.346,-12.278 114.751,-12.272 132.808,-12.241 133.562,-12.222 134.316,-12.223 135.07,-12.223 135.824,-12.223 136.578,-12.224 137.332,-12.224 138.086,-12.224 138.84,-12.225 139.594,-12.225 140.348,-12.225 141.102,-12.226 141.856,-12.226 142.61,-12.227 143.364,-12.227 144.118,-12.227 144.872,-12.228 145.626,-12.228 146.655,-12.228 118.191,-12.212 168.188,-12.175 59.57,-12.166 164.452,-12.148 158.653,-12.142 9.824,-12.096 75.918,-12.105 113.268,-12.082 114.022,-12.082 117.449,-12.075 124.429,-12.072 39.534,-12.051 79.276,-12.05 12.843,-11.972 92.496,-11.971 122.93,-11.955 123.684,-11.955 2.271,-11.923 4.271,-11.923 6.271,-11.923 8.271,-11.923 14.271,-11.923 26.271,-11.923 28.271,-11.923 30.271,-11.923 32.271,-11.923 34.271,-11.923 40.271,-11.923 42.271,-11.923 48.271,-11.923 54.271,-11.923 56.271,-11.923 60.271,-11.923 66.271,-11.923 72.271,-11.923 74.271,-11.923 80.271,-11.923 82.271,-11.923 84.271,-11.923 86.271,-11.923 88.271,-11.923 94.271,-11.923 96.271,-11.923 104.271,-11.923 106.271,-11.923 108.271,-11.923 120.271,-11.923 128.271,-11.923 130.271,-11.923 148.271,-11.923 150.271,-11.923 152.271,-11.923 160.271,-11.923 162.271,-11.923 36.488,-11.901 122.178,-11.903 101.78,-11.885 111.804,-11.869 111.051,-11.849 154.185,-11.86 112.557,-11.829 126.476,-11.833 97.809,-11.792 89.622,-11.77 49.396,-11.652 168.721,-11.641 159.186,-11.609 10.358,-11.563 39,-11.518 58.032,-11.518 50.934,-11.492 13.376,-11.439 59.57,-11.412 110.445,-11.399 164.522,-11.397 35.955,-11.368 75.918,-11.351 102.313,-11.351 154.718,-11.327 79.276,-11.296 98.343,-11.258 92.496,-11.217 121.879,-11.211 126.649,-11.099 159.719,-11.076 10.891,-11.03 89.622,-11.016 169.137,-11.012 38.467,-10.985 13.91,-10.906 57.576,-10.918 49.396,-10.898 35.422,-10.835 102.847,-10.818 155.251,-10.794 50.934,-10.738 98.876,-10.725 164.886,-10.736 110.202,-10.685 59.459,-10.666 75.918,-10.597 79.276,-10.542 160.252,-10.542 11.424,-10.496 37.934,-10.451 56.991,-10.442 92.496,-10.463 121.879,-10.457 56.237,-10.435 14.443,-10.373 126.691,-10.346 34.889,-10.301 103.38,-10.285 169.254,-10.267 89.622,-10.262 155.784,-10.261 99.409,-10.192 165.414,-10.199 49.313,-10.148 58.946,-10.114 160.786,-10.009 11.957,-9.963 110.405,-9.959 115.316,-9.943 3.271,-9.923 5.271,-9.923 7.271,-9.923 9.271,-9.923 37.401,-9.918 39.271,-9.923 41.271,-9.923 43.271,-9.923 47.271,-9.923 61.271,-9.923 65.271,-9.923 71.271,-9.923 73.271,-9.923 75.271,-9.923 81.271,-9.923 83.271,-9.923 85.271,-9.923 87.271,-9.923 93.271,-9.923 95.271,-9.923 97.271,-9.923 105.271,-9.923 107.271,-9.923 109.271,-9.923 127.271,-9.923 129.271,-9.923 131.271,-9.923 133.271,-9.923 135.271,-9.923 137.271,-9.923 139.271,-9.923 141.271,-9.923 143.271,-9.923 145.271,-9.923